# Altium PCB Pedal_PCB.PcbDoc
Units mm, origin at the board's own origin, x right, y up, seen from the top; angles counter-clockwise.
Board outline 43.31 x 41 mm, 2 copper layers (Top Layer, Bottom Layer); 36 components, 20 nets, 80 pads, 0 vias.
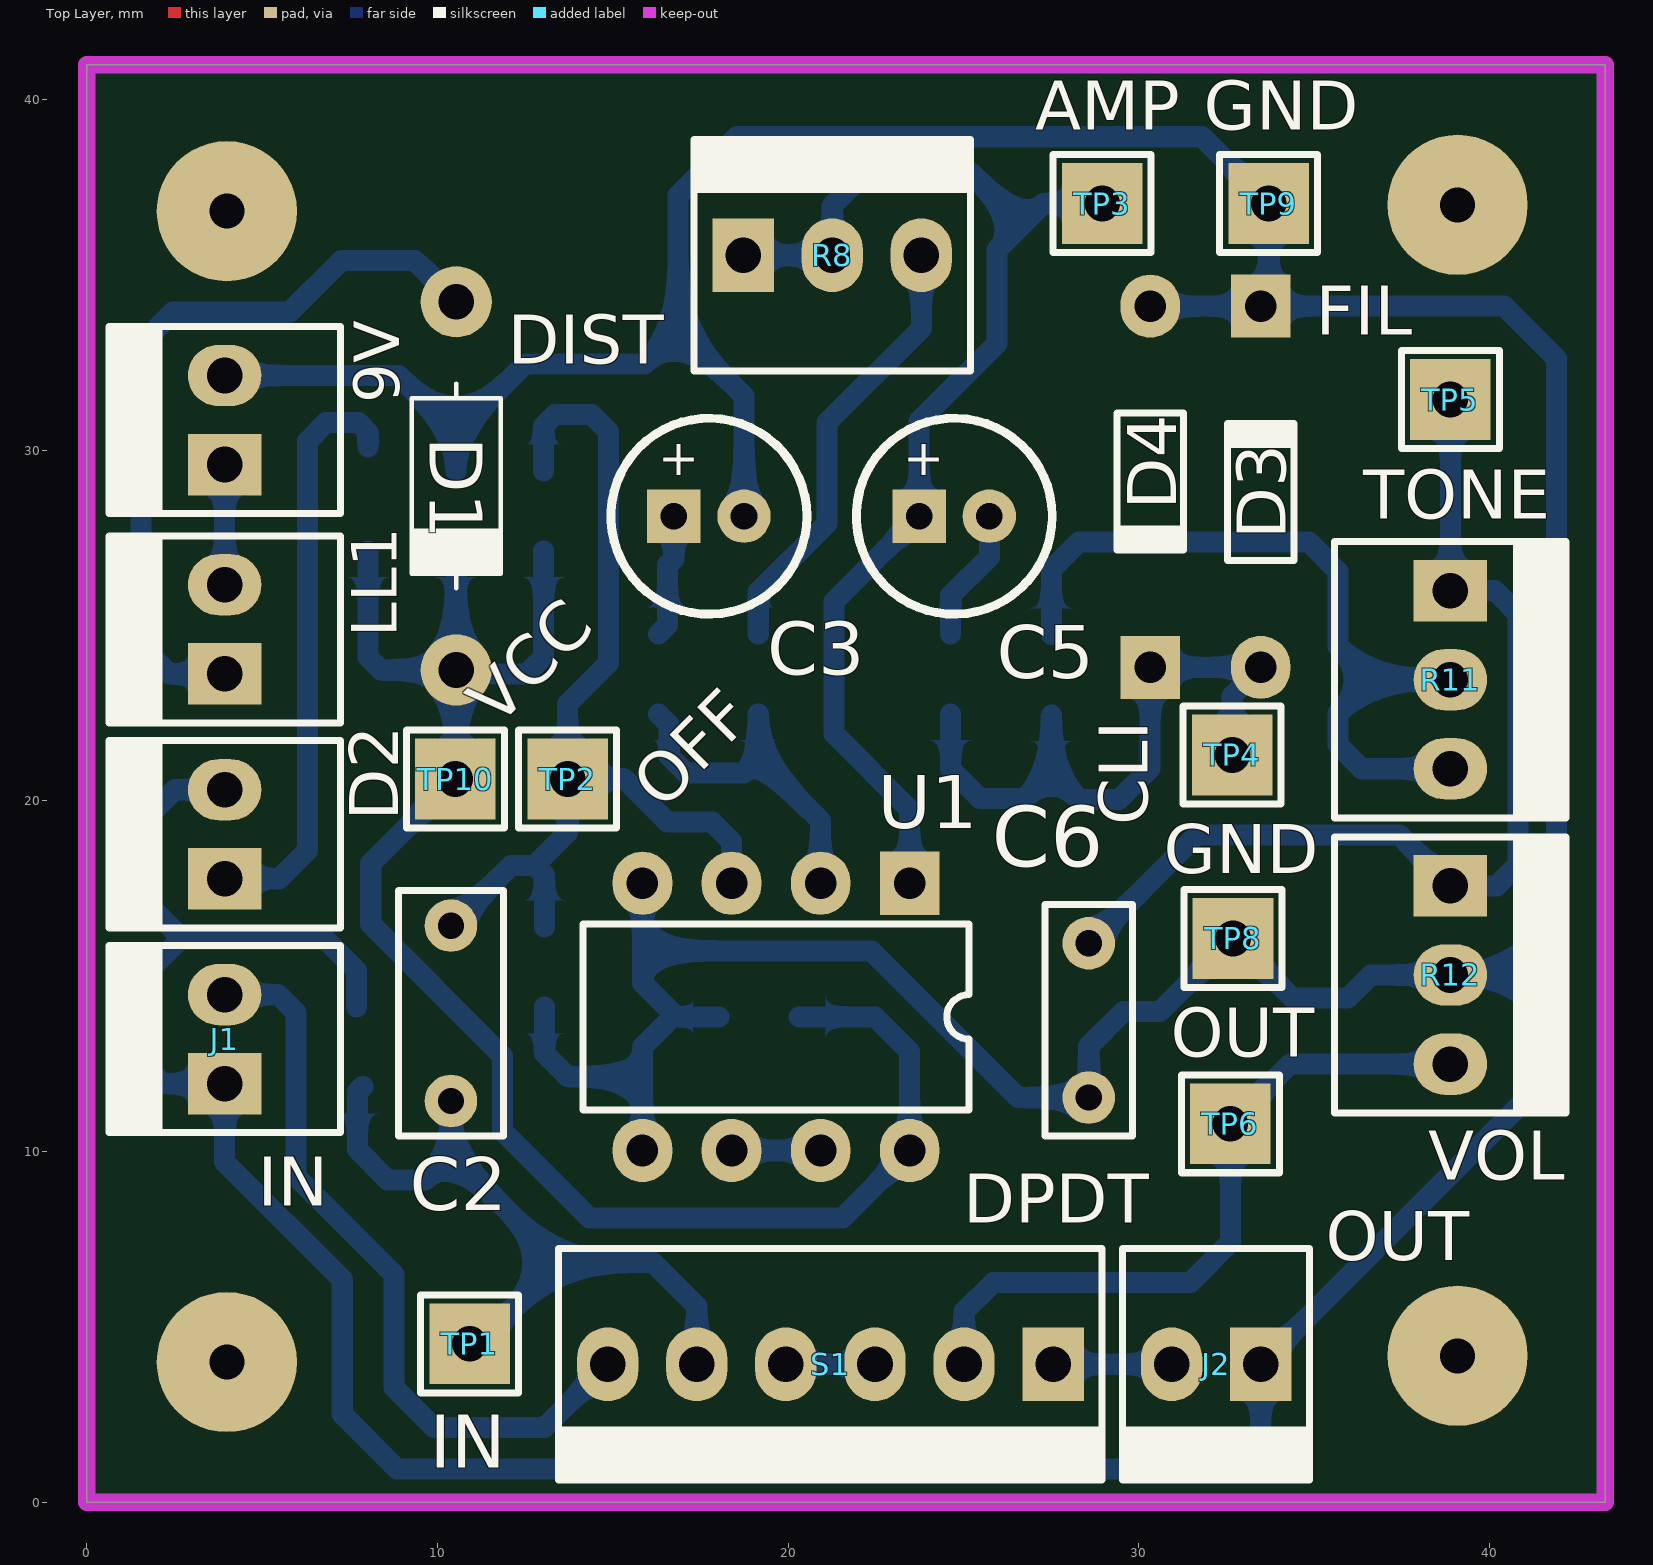
[diagram p0: Top Layer view]
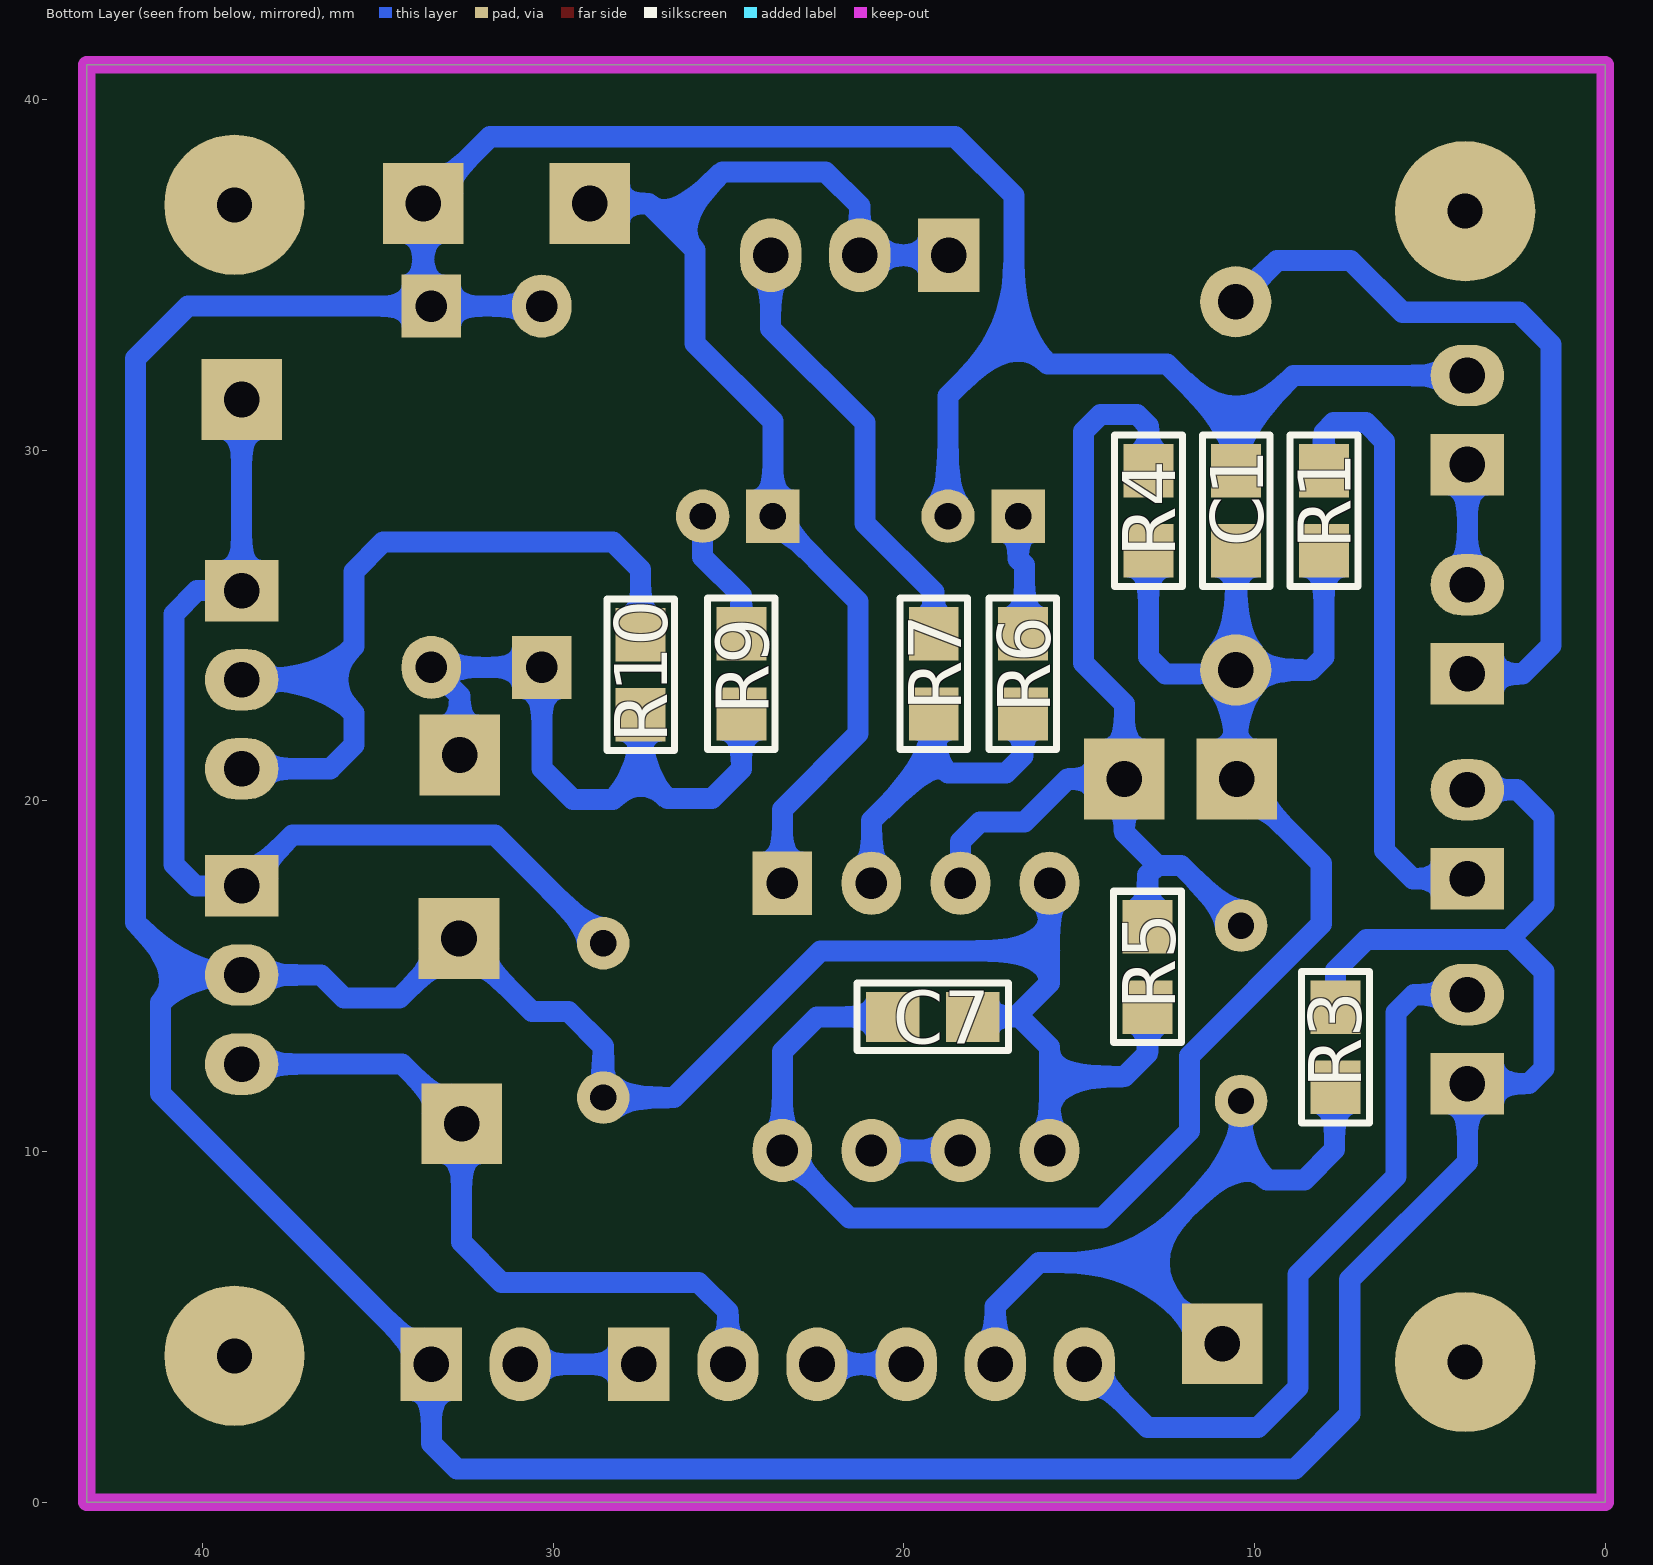
[diagram p1: Bottom Layer view, seen from below]

## Layer stack, top to bottom
Top Solder: solder mask 0.0102, Solder Resist, Dk 3.5
Top Layer: signal copper 0.0356
Dielectric 1: dielectric 0.32, FR-4, Dk 4.8
Bottom Layer: signal copper 0.0356
Bottom Solder: solder mask 0.0102, Solder Resist, Dk 3.5

## Board outline
0,0 43.307,0 43.307,40.996 0,40.996

## Design rules (kind name [scope] priority, off if disabled: settings)
Clearance [All] p1: gap=0.4
PolygonConnect [All] p1: connectstyle=Relief reliefconductorwidth=0.254 reliefentries=4 polygonreliefangle="90 Angle" airgapwidth=0.254
RoutingVias [All] p1: holewidth=0.711 width=1.27 viastyle="Through Hole" minholewidth=0.711 minwidth=1.27 maxholewidth=0.711 maxwidth=1.27
SolderMaskExpansion [All] p1: expansion=0.102
Width [All] p1: maxlimit=0.7 minlimit=0.6 preferedwidth=0.6
30 further rules are at their usual default settings.

## Components (designator, comment, footprint, x,y, rotation, side; value= is the part's Value field where it differs from the comment)
9V "9V" MOLEX2 3.937,29.591 r90 top (schematic designator BATERRY)
C1 "100nF" 0805 10.528,28.27 r90 bottom
C2 "330nF" CAP_FILM 10.389,13.945 r90 top
C3 "10uF" CAP100RP 17.745,28.118 r0 top
C5 "1uF" CAP100RP 24.74,28.118 r0 top
C6 "10nF" CAP_FILM_POLY 28.575,13.741 r270 top
C7 "100nF" 0805 19.177,13.843 r0 bottom
D1 "1N5819" DO-41 10.541,28.981 r270 top
D2 "LED" MOLEX2 3.937,17.78 r90 top
D3 "1N4148" DO-35 33.477,28.808 r90 top
D4 "1N4148" DO-35 30.328,29.108 r270 top
J1 "IN" MOLEX2 3.937,11.938 r90 top
J2 "OUT" MOLEX2 33.477,3.937 r180 top
LL1 "LLAVE ON" MOLEX2 3.937,23.622 r90 top
R1 "1kR" 0805 8.026,28.27 r90 bottom
R3 "220kR" 0805 7.696,12.979 r90 bottom
R4 "470kR" 0805 13.03,28.27 r270 bottom
R5 "470kR" 0805 13.056,15.265 r270 bottom
R6 "10kR" 0805 16.612,23.622 r90 bottom
R7 "10kR" 0805 19.152,23.622 r270 bottom
R8 "250kR" MOLEX3 18.72,35.56 r0 top
R9 "2k2R" 0805 24.638,23.622 r270 bottom
R10 "1kR" 0805 27.508,23.597 r270 bottom
R11 "100kR" MOLEX3 38.887,25.997 r270 top
R12 "250kR" MOLEX3 38.887,17.577 r270 top
S1 "DPDT" MOLEX6 27.559,3.937 r180 top
TP1 "IN" TPTH 10.922,4.521 r0 top
TP2 "OFF" TPTH 13.716,20.625 r0 top
TP3 "AMP" TPTH 28.956,37.033 r90 top
TP4 "CLI" TPTH 32.664,21.311 r0 top
TP5 "FIL" TPTH 38.887,31.445 r0 top
TP6 "OUT" TPTH 32.614,10.795 r0 top
TP8 "GND" TPTH 32.69,16.078 r0 top
TP9 "GND" TPTH 33.706,37.033 r0 top
TP10 "VCC" TPTH 10.516,20.625 r90 top
U1 "TL082P" P008 19.66,13.843 r180 top

## Footprints (in the part's own frame and the unit in brackets; to place one, negate y for a bottom-side part, rotate by r counter-clockwise, add the part's x,y. Pads: shape width x height; smd on the part's side, far side on the other; paste and mask are expansions set on the pad)
0805 [mil] "Pasivo 0805"
  rect 60x56 smd: 1(-45,0) 2(45,0)
  silkscreen extent -85,-38 85,38, body extent -40,-25 39,25, height 15
CAP100RP [mil] "Body diameter 5mm"
  rect 60x60 hole 30: 1(-39.37,0)
  round 60 hole 30: 2(39.37,0)
  silkscreen extent -110,-110 110,110, body extent -99,-99 99,100, height 454
CAP_FILM [mm]
  round 1.5 hole 0.75: 1(-2.5,0) 2(2.5,0)
  silkscreen extent -3.5,-1.5 3.5,1.5, body extent -3.6,-1.27 3.6,1.24, height 7
CAP_FILM_POLY [mm]
  round 1.5 hole 0.75: 1(-2.2,0) 2(2.2,0)
  silkscreen extent -3.3,-1.25 3.3,1.25, body extent -6,-3.3 6,3.2, height 16.1
DO-35 [mm] "Diode, Axial; Body 3.8 x 1.9 mm (LxDia. max), Lead Dia. 0.53 mm (max)"
  oval 1.8x1.7 hole 0.9: 1(-5,0)
  rect 1.8x1.7 hole 0.9: 2(5.3,0)
  silkscreen extent -1.95,-0.95 2.05,0.95, body extent -5.22,-0.89 5.47,0.86, height 2.15
DO-41 [mil]
  round 80 hole 40: A(-206.69,0) K(206.69,0)
  silkscreen extent -115,-50 115,50, body extent -224,-54 224,54, height 113
MOLEX2 [mm]
  rect 1.75x2.1 hole 1.016: 1(0,0)
  oval 1.75x2.1 hole 1.016: 2(2.54,0)
  silkscreen extent -1.4,-3.3 3.94,3.3, body extent -1.27,-3.17 3.81,3.18, height 10.74
MOLEX3 [mm]
  rect 1.75x2.1 hole 1.016: 1(0,0)
  oval 1.75x2.1 hole 1.016: 2(2.54,0) 3(5.08,0)
  silkscreen extent -1.4,-3.3 6.48,3.3, body extent -1.27,-3.17 6.35,3.17, height 10.74
MOLEX6 [mm]
  rect 1.75x2.1 hole 1.016: 1(0,0)
  oval 1.75x2.1 hole 1.016: 2(2.54,0) 3(5.08,0) 4(7.62,0) 5(10.16,0) 6(12.7,0)
  silkscreen extent -1.4,-3.3 14.1,3.3, body extent -1.27,-3.17 13.97,3.18, height 10.74
P008 [mm] "DIP; 8 Leads; Row Spacing 7.62 mm; Pitch 2.54 mm"
  rect 1.7x1.8 hole 0.9: 1(-3.81,-3.81)
  oval 1.7x1.8 hole 0.9: 2(-1.27,-3.81) 3(1.27,-3.81) 4(3.81,-3.81) 5(3.81,3.81) 6(1.27,3.81) 7(-1.27,3.81) 8(-3.81,3.81)
  silkscreen extent -5.5,-2.65 5.5,2.65, body extent -5.71,-3.81 5.72,4.06, height 4.19
TPTH [mm]
  rect 2.3x2.3 hole 1.016: 1(0,0)
  silkscreen extent -1.4,-1.4 1.4,1.4, body extent -1.27,-1.27 1.27,1.27, height 6.04

## Part data
9V: library part BATERIA, "BATERIA"
C1 C2 C6 C7: library part CAP
C3 C5: library part CAPPOL
D1: library part "DIODE SCHOTTKY"
D3 D4: library part "Diode 1N4148", "High Conductance Fast Diode"
J1: library part MOLEX2, "INPUT"
J2: library part MOLEX2
LL1: "Llave ON"
R1 R3 R4 R5 R6 R7 R9 R10: library part RES
R8 R11 R12: library part POTENCIOMETRO
S1: library part SW-DPDT, "Double-Pole, Double-Throw Switch"
TP1 TP2 TP3 TP4 TP5 TP6 TP8 TP9 TP10: library part TP
U1: "JFET-Input Operational Amplifier"

## Free pads (board coordinates)
  round 4 hole 1: 0(4,4) 0(4,36.818) 0(39.091,4.178) 0(39.091,36.996)

## Nets (pads, with @x,y where several pads share a name; then routed paths per layer and width w, separated by ;. In a path a pad name is that pad's centre, name@x,y a point inside that pad or via, vN(x,y) a via of type N, cw(c..) or ccw(c..) an arc to the next point about the centre after c; other vN are vias at no path point)
9V: 9V.1 LL1.2 | length 3.4
  Bottom Layer w0.6: LL1.2 9V.1
AMP_SIGNAL: C5.1 R8.1 R8.2 TP3.1 U1.1 | length 34.8
  Bottom Layer w0.6: R8.1 R8.2 21.26,36.957 22.241,37.938 25.181,37.938 26.683,36.436 ; U1.1 23.47,19.761 21.311,21.92 21.311,25.689 C5.1 23.74,30.826 25.959,33.045 25.959,35.712 26.683,36.436 ; TP3.1 27.28,37.033 26.683,36.436
CLIP_SIGNAL: D3.1 D4.2 R9.2 R10.2 TP4.1 | length 19.1
  Bottom Layer w0.6: R9.2 24.638,20.904 25.476,20.066 26.746,20.066 27.508,20.828 ; R10.2 27.508,20.828 ; TP4.1 32.664,22.996 D3.1 D4.2 30.328,20.93 29.439,20.041 28.296,20.041 27.508,20.828
FILTER_SIGNAL: C6.1 R11.1 R12.1 TP5.1 | length 29.2
  Bottom Layer w0.6: C6.1 31.658,19.025 37.44,19.025 R12.1 40.208,17.577 40.818,18.186 40.818,25.336 40.157,25.997 R11.1 ; TP5.1 R11.1 ; R11.1@38.913,26.022 R11.1
GND: 9V.2 C1.2 C3.2 C6.2 C7.1 D2.2 D3.2 D4.1 J1.1 J2.1 R3.2 R5.2 R12.2 TP8.1 TP9.1 U1.4 U1.5 | length 195.6
  Bottom Layer w0.6: D2.2 2.515,20.32 1.753,19.558 1.753,17.043 2.705,16.091 2.667,16.053 ; 9V.2 8.89,32.131 10.528,30.493 ; R3.2 7.696,15.164 6.807,16.053 2.667,16.053 ; C1.2 10.528,30.493 ; R5.2 13.056,12.802 13.716,12.141 15.85,12.141 ; U1.5 15.85,12.141 ; 15.85,12.878 15.85,12.141 ; 15.85,12.979 16.764,13.894 15.85,14.808 15.85,15.723 ; U1.4 15.85,15.723 ; 16.815,13.843 C7.1 ; C3.2 18.745,31.547 16.866,33.426 ; D4.1 D3.2 ; 2.667,16.053 1.753,15.138 1.753,12.37 2.184,11.938 J1.1 3.937,9.703 7.29,6.35 7.29,2.515 8.854,0.95 32.751,0.95 33.477,1.676 J2.1 41.199,11.659 41.199,14.249 40.411,15.037 ; 10.528,30.493 12.497,32.461 15.9,32.461 16.866,33.426 ; 15.85,15.723 22.377,15.723 26.559,11.541 C6.2 28.575,13.005 29.566,13.995 30.607,13.995 TP8.1 34.392,14.376 35.966,14.376 36.627,15.037 R12.2 40.411,15.037 ; 16.866,33.426 16.866,37.262 18.542,38.938 31.801,38.938 TP9.1 33.706,34.337 D3.2 ; D3.2 40.415,34.108 41.91,32.614 41.91,16.535 40.411,15.037
INPUT_SIGNAL: C2.1 R3.1 S1.5 TP1.1 | length 20.8
  Bottom Layer w0.6: R3.1@7.874,11.862 7.722,11.709 7.722,10.058 8.585,9.195 9.652,9.195 10.389,9.931 ; C2.1@10.643,11.419 10.389,11.165 10.389,9.931 ; TP1.1 11.176,4.521 13.487,6.833 ; S1.5 17.399,5.588 16.154,6.833 13.487,6.833 ; 10.389,9.931 13.487,6.833
NetC3_1: C3.1 R6.2 | length 3.5
  Bottom Layer w0.6: R6.2@16.307,24.765 16.561,25.019 16.561,26.721 16.745,26.905 C3.1
NetC5_2: C5.2 R9.1 | length 3.8
  Bottom Layer w0.6: R9.1 24.638,25.857 25.74,26.959 C5.2
NetD1_A: D1.A LL1.1 | length 21.8
  Bottom Layer w0.6: LL1.1 2.362,23.622 1.549,24.435 1.549,33.02 2.464,33.934 5.791,33.934 7.264,35.408 9.365,35.408 D1.A
NetD2_1: D2.1 R1.2 | length 16.8
  Bottom Layer w0.6: D2.1 5.486,17.78 6.299,18.593 6.299,30.251 6.833,30.785 7.747,30.785 8.026,30.505 R1.2@8.026,30.099
NetJ1_2: J1.2 S1.6 | length 21.4
  Bottom Layer w0.6: J1.2 5.461,14.478 5.969,13.97 5.969,9.296 8.763,6.502 8.763,3.277 9.906,2.134 13.056,2.134 S1.6
NetJ2_2: J2.2 S1.1 | length 3.4
  Bottom Layer w0.6: S1.1 J2.2
NetR6_1: R6.1 R7.2 U1.2 | length 9.8
  Bottom Layer w0.6: R6.1@16.307,22.479 16.612,22.174 16.612,21.285 17.094,20.803 18.745,20.803 19.152,21.209 ; R7.2 19.152,21.209 ; U1.2 20.92,17.662 20.92,19.44 19.152,21.209
NetR7_1: R7.1 R8.3 | length 12.7
  Bottom Layer w0.6: R7.1 19.152,25.959 21.107,27.915 21.107,30.785 23.8,33.477 R8.3
NetR10_1: R10.1 R11.2 R11.3 | length 22.2
  Bottom Layer w0.6: R10.1 27.508,26.594 28.296,27.381 34.849,27.381 35.687,26.543 35.687,24.409 36.639,23.457 ; R11.3 36.36,20.917 35.687,21.59 35.687,22.504 36.639,23.457 ; R11.2 36.639,23.457
NetS1_3: S1.3 S1.4 | length 2.5
  Bottom Layer w0.6: S1.4 S1.3
NetU1_6: U1.6 U1.7 | length 2.5
  Bottom Layer w0.6: U1.6 U1.7
OFFSET_SIGNAL: C2.2 R4.1 R5.1 TP2.1 U1.3 | length 28.3
  Bottom Layer w0.6: C2.2 12.105,18.161 12.776,18.161 ; R4.1 13.03,30.683 13.36,31.013 14.402,31.013 14.884,30.531 14.884,23.927 13.716,22.758 TP2.1 ; R5.1 13.056,17.882 12.776,18.161 ; U1.3 18.39,18.847 17.831,19.406 16.561,19.406 15.342,20.625 TP2.1 ; 12.776,18.161 13.716,19.101 TP2.1
OUTPUT_SIGNAL: R12.3 S1.2 TP6.1 | length 20.3
  Bottom Layer w0.6: S1.2 25.019,5.436 25.857,6.274 31.471,6.274 32.614,7.417 TP6.1 34.315,12.497 R12.3
VCC: C1.1 C7.2 D1.K R1.1 R4.2 TP10.1 U1.8 | length 48.6
  Bottom Layer w0.6: R1.1 8.026,24.105 8.4,23.731 D1.K TP10.1@10.541,20.295 ; TP10.1 8.103,18.212 8.103,16.485 11.862,12.725 11.862,10.592 14.342,8.112 21.549,8.112 U1.8 23.47,12.852 22.479,13.843 C7.2 ; D1.K@10.528,24.676 C1.1 ; 11.582,23.622 12.548,23.622 13.03,24.105 R4.2

## Keep-outs
Keep-Out Layer:
  the board outline again, w0.5

## Silkscreen, mask and mechanical layers (free items; w line width, h text height)
Top Overlay:
  text "DIST" at 12.014,32.461 h1.4
  text "TONE" at 36.398,28.042 h1.4
  text "VOL" at 38.252,9.195 h1.4

## Text inside footprints (layer, text, board x,y; h text height)
C3: Top Overlay "+" at 16.297,29.286 h1.02
C5: Top Overlay "+" at 23.292,29.286 h1.02